# Altium PCB Copy of PCB1.PcbDoc
Units mm, origin at the board's own origin, x right, y up, seen from the top; angles counter-clockwise.
Board outline 152.4 x 101.6 mm, 2 copper layers (Top Layer, Bottom Layer); 14 components, 36 nets, 99 pads, 0 vias.
Unrouted connection lines stored in the file: 9.
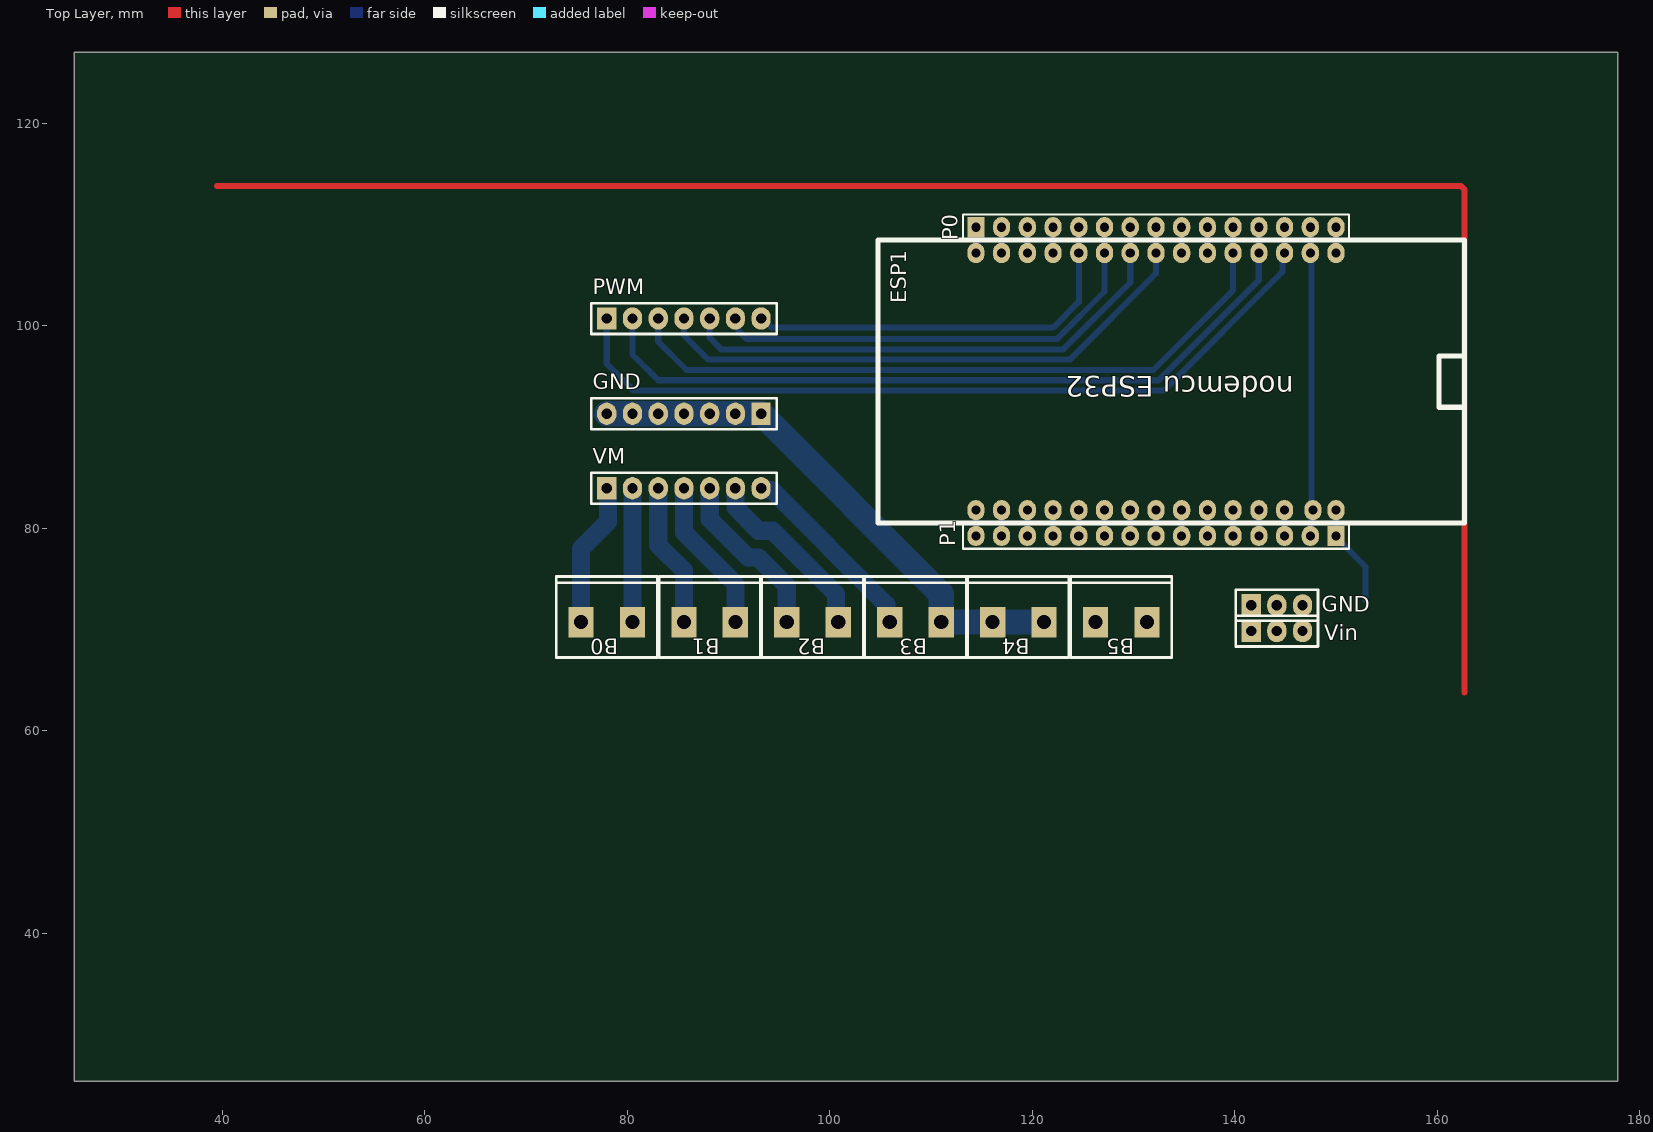
[diagram p0: Top Layer view]
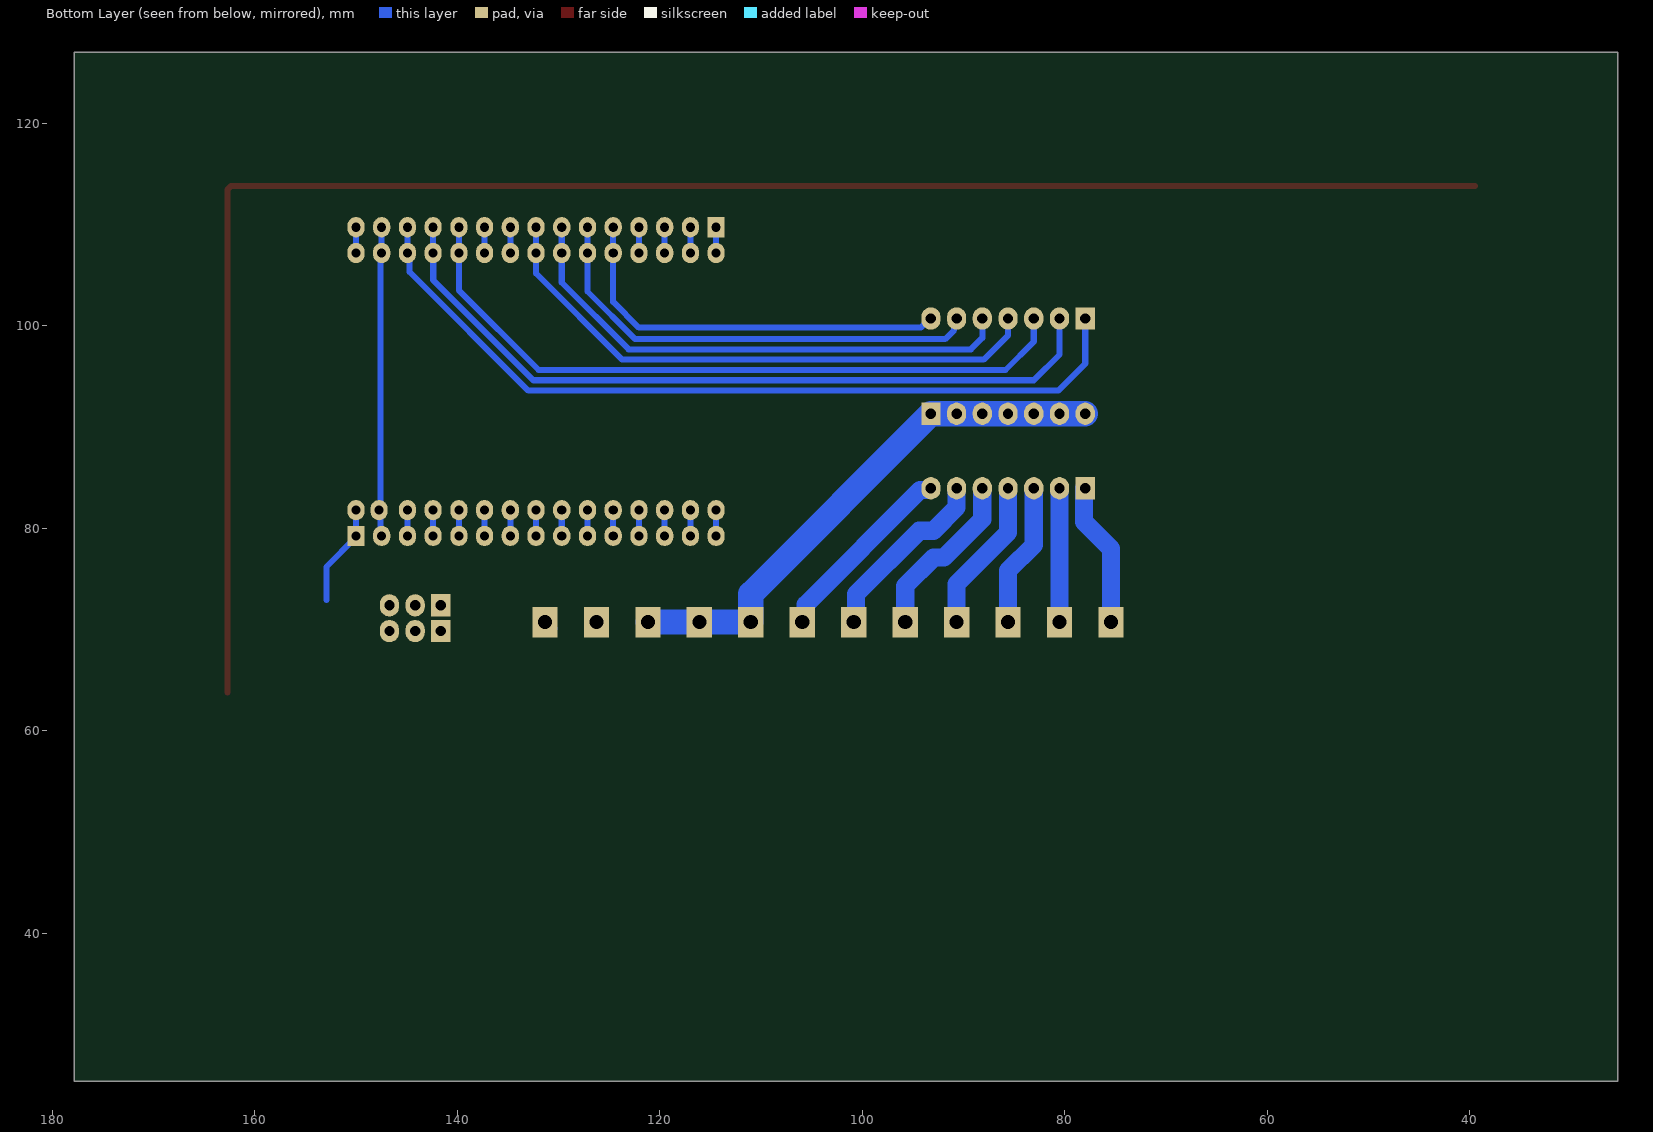
[diagram p1: Bottom Layer view, seen from below]

## Layer stack, top to bottom
Top Solder: solder mask 0.0102, Solder Resist, Dk 3.5
Top Layer: signal copper 0.0356
Dielectric 1: dielectric 0.32, FR-4, Dk 4.8
Bottom Layer: signal copper 0.0356
Bottom Solder: solder mask 0.0102, Solder Resist, Dk 3.5

## Board outline
25.4,25.4 177.8,25.4 177.8,127 25.4,127

## Design rules (kind name [scope] priority, off if disabled: settings)
Clearance [All] p1: gap=0.254 ignorepadtopadclearanceinfootprint=FALSE except(0: Arc-Hole Track-Hole SMDPad-Hole THPad-Hole Via-Hole Fill-Hole Poly-Hole Region-Hole Text-Hole)
ComponentClearance [All] p1: gap=0 collisioncheckmode=3 verticalgap=0 showdistances=FALSE
PolygonConnect [All] p1: connectstyle=Relief reliefconductorwidth=0.254 reliefentries=4 polygonreliefangle="90 Angle" airgapwidth=0.254
RoutingVias [All] p1: holewidth=0.711 width=1.27 viastyle="Through Hole" minholewidth=0.711 minwidth=1.27 maxholewidth=0.711 maxwidth=1.27
SolderMaskExpansion [All] p1: expansion=0.102 istentingtop=FALSE
Width [All] p1: maxlimit=4 minlimit=0.254 preferedwidth=1 toplayer_maxwidth=2 minimp=50.000000 maximp=50.000000 favimp=50.000000
29 further rules are at their usual default settings.

## Classes and differential pairs
component class Esquematico: B0 B1 B2 B3 B4 B5 GND P0 P1 PWM Vin VM

## Components (designator, comment, footprint, x,y, rotation, side; value= is the part's Value field where it differs from the comment)
B0 "bornera" "bornera chica" 82.978,75.239 r180 top
B1 "bornera" "bornera chica" 93.138,75.239 r180 top
B2 "bornera" "bornera chica" 103.298,75.239 r180 top
B3 "bornera" "bornera chica" 113.458,75.239 r180 top
B4 "bornera" "bornera chica" 123.618,75.239 r180 top
B5 "bornera" "bornera chica" 133.778,75.239 r180 top
ESP1 "ESP32" ESP32 149.987,81.788 r90 top
GND "Header 7" "Header 7" 93.218,91.313 r180 top
GND "Header 3" "Header 3" 141.605,72.39 r0 top (schematic designator P2)
P0 "Header 15" HDR1X15 114.427,109.728 r0 top
P1 "Header 15" HDR1X15 149.987,79.248 r180 top
PWM "Header 7" "Header 7" 77.978,100.711 r0 top
Vin "Header 3" "Header 3" 141.605,69.85 r0 top (schematic designator P3)
VM "Header 7" "Header 7" 77.978,83.947 r0 top

## Footprints (in the part's own frame and the unit in brackets; to place one, negate y for a bottom-side part, rotate by r counter-clockwise, add the part's x,y. Pads: shape width x height; smd on the part's side, far side on the other; paste and mask are expansions set on the pad)
"bornera chica" [mm]
  rect 2.5x3 hole 1.4: 1(2.46,4.5) 2(7.54,4.5)
  silkscreen extent 0,0 10,8
ESP32 [mm]
  oval 2x1.7 hole 0.9: 0(0,0) 1(0,2.286) 2(0,5.08) 3(0,7.62) 4(0,10.16) 5(0,12.7) 6(0,15.24) 7(0,17.78) 8(0,20.32) 9(0,22.86) 10(0,25.4) 11(0,27.94) 12(0,30.48) 13(0,33.02) 14(0,35.56) 15(25.4,35.56) 16(25.4,33.02) 17(25.4,30.48) 18(25.4,27.94) 19(25.4,25.4) 20(25.4,22.86) 21(25.4,20.32) 22(25.4,17.78) 23(25.4,15.24) 24(25.4,12.7) 25(25.4,10.16) 26(25.4,7.62) 27(25.4,5.08) 28(25.4,2.54) 29(25.4,0)
  silkscreen extent -1.27,-12.7 26.67,45.21
HDR1X15 [mm] "Connector; Header; 15 Position"
  rect 1.7x2 hole 0.9: 1(0,0)
  oval 1.7x2 hole 0.9: 2(2.54,0) 3(5.08,0) 4(7.62,0) 5(10.16,0) 6(12.7,0) 7(15.24,0) 8(17.78,0) 9(20.32,0) 10(22.86,0) 11(25.4,0) 12(27.94,0) 13(30.48,0) 14(33.02,0) 15(35.56,0)
  silkscreen extent -1.27,-1.27 36.83,1.27
"Header 3" [mm] "Connector; Header; 3 Position; Solder Pad 35mil"
  rect 1.9x2.2 hole 1.016: 1(0,0)
  oval 1.9x2.2 hole 1.016: 2(2.54,0) 3(5.08,0)
  silkscreen extent -1.52,-1.52 6.6,1.52, body extent -1.27,-1.27 6.35,1.27, height 2.11
"Header 7" [mm] "Connector; Header; 7 Position; Solder Pad 35mil"
  rect 1.9x2.2 hole 1.016: 1(0,0)
  oval 1.9x2.2 hole 1.016: 2(2.54,0) 3(5.08,0) 4(7.62,0) 5(10.16,0) 6(12.7,0) 7(15.24,0)
  silkscreen extent -1.52,-1.52 16.76,1.52, body extent -1.27,-1.27 16.51,1.27, height 8.38

## Part data
GND PWM VM: "Header, 7-Pin", LatestRevisionDate=17-Jul-2002, LatestRevisionNote="Re-released for DXP Platform.", Publisher="Altium Limited"
GND Vin: "Header, 3-Pin", LatestRevisionDate=17-Jul-2002, LatestRevisionNote="Re-released for DXP Platform.", Publisher="Altium Limited"
P0 P1: "Header, 15-Pin", LatestRevisionDate=17-Jul-2002, LatestRevisionNote="Re-released for DXP Platform.", Publisher="Altium Limited"

## Nets (pads, with @x,y where several pads share a name; then routed paths per layer and width w, separated by ;. In a path a pad name is that pad's centre, name@x,y a point inside that pad or via, vN(x,y) a via of type N, cw(c..) or ccw(c..) an arc to the next point about the centre after c; other vN are vias at no path point)
ESP_Vin: B5.2 ESP1.0 P1.1 | length 10.1
  Bottom Layer w0.6: ESP1.0 P1.1 149.987,79.098 152.908,76.177 152.908,72.898
GND: B3.1 B4.1 B4.2 B5.1 ESP1.1 ESP1.28 GND.1 GND.2 GND.3 GND.4 GND.5 GND.6 GND.7 P0.14 P1.2 | length 84.9
  Bottom Layer w0.6: P1.2 147.574,79.375 147.574,81.661 ESP1.1 147.574,81.915 147.574,107.061 ESP1.28 P0.14
  Bottom Layer w1.2: B5.1@130.668,70.089 B5.1
  Bottom Layer w2.5: GND.7 GND.6 GND.5 GND.4 88.138,91.313 90.678,91.313 93.218,91.313 110.998,73.533 B3.1 B4.2 B4.1
NetESP1_2: ESP1.2 P1.3 | length 2.5
  Bottom Layer w0.6: P1.3 ESP1.2
NetESP1_3: ESP1.3 P1.4 | length 2.5
  Bottom Layer w0.6: P1.4 ESP1.3
NetESP1_4: ESP1.4 P1.5 | length 2.5
  Bottom Layer w0.6: P1.5 ESP1.4
NetESP1_5: ESP1.5 P1.6 | length 2.5
  Bottom Layer w0.6: P1.6 ESP1.5
NetESP1_6: ESP1.6 P1.7 | length 2.5
  Bottom Layer w0.6: P1.7 ESP1.6
NetESP1_7: ESP1.7 P1.8 | length 2.5
  Bottom Layer w0.6: P1.8 ESP1.7
NetESP1_8: ESP1.8 P1.9 | length 2.5
  Bottom Layer w0.6: P1.9 ESP1.8
NetESP1_9: ESP1.9 P1.10 | length 2.5
  Bottom Layer w0.6: P1.10 ESP1.9
NetESP1_10: ESP1.10 P1.11 | length 2.5
  Bottom Layer w0.6: P1.11 ESP1.10
NetESP1_11: ESP1.11 P1.12 | length 2.5
  Bottom Layer w0.6: P1.12 ESP1.11
NetESP1_12: ESP1.12 P1.13 | length 2.5
  Bottom Layer w0.6: P1.13 ESP1.12
NetESP1_13: ESP1.13 P1.14 | length 2.5
  Bottom Layer w0.6: P1.14 ESP1.13
NetESP1_14: ESP1.14 P1.15 | length 2.5
  Bottom Layer w0.6: P1.15 ESP1.14
NetESP1_15: ESP1.15 P0.1 | length 2.5
  Bottom Layer w0.6: ESP1.15 P0.1
NetESP1_16: ESP1.16 P0.2 | length 2.5
  Bottom Layer w0.6: ESP1.16 P0.2
NetESP1_17: ESP1.17 P0.3 | length 2.5
  Bottom Layer w0.6: ESP1.17 P0.3
NetESP1_18: ESP1.18 P0.4 | length 2.5
  Bottom Layer w0.6: ESP1.18 P0.4
NetESP1_23: ESP1.23 P0.9 | length 2.5
  Bottom Layer w0.6: ESP1.23 P0.9
NetESP1_24: ESP1.24 P0.10 | length 2.5
  Bottom Layer w0.6: ESP1.24 P0.10
NetESP1_29: ESP1.29 P0.15 | length 2.5
  Bottom Layer w0.6: ESP1.29 P0.15
PWM_M0: ESP1.27 P0.13 PWM.1 | length 81.6
  Bottom Layer w0.6: PWM.1 77.978,96.266 80.645,93.599 132.969,93.599 144.703,105.333 144.703,106.984 ESP1.27 P0.13
PWM_M1: ESP1.26 P0.12 PWM.2 | length 75.8
  Bottom Layer w0.6: PWM.2 80.518,97.155 83.058,94.615 132.461,94.615 142.353,104.507 142.353,107.174 ESP1.26 P0.12
PWM_M2: ESP1.25 P0.11 PWM.3 | length 69.7
  Bottom Layer w0.6: PWM.3 83.058,98.425 85.852,95.631 131.953,95.631 139.827,103.505 ESP1.25 P0.11
PWM_M3: ESP1.22 P0.8 PWM.4 | length 57.4
  Bottom Layer w0.6: PWM.4 85.598,99.06 88.011,96.647 123.698,96.647 132.207,105.156 ESP1.22 P0.8
PWM_M4: ESP1.21 P0.7 PWM.5 | length 52.1
  Bottom Layer w0.6: PWM.5 88.138,98.806 89.281,97.663 123.063,97.663 129.667,104.267 ESP1.21 P0.7
PWM_M5: ESP1.20 P0.6 PWM.6 | length 46.1
  Bottom Layer w0.6: PWM.6 90.927,100.462 90.927,99.573 91.821,98.679 122.428,98.679 127.127,103.378 ESP1.20 P0.6
PWM_M6: ESP1.19 P0.5 PWM.7 | length 40.2
  Bottom Layer w0.6: PWM.7 93.33,100.711 94.219,99.822 122.047,99.822 124.587,102.362 ESP1.19 P0.5
VM0: B0.2 VM.1 | length 14.3
  Bottom Layer w1.8: B0.2 75.438,77.978 78.105,80.645 VM.1@78.105,83.947
VM1: B0.1 VM.2 | length 13.2
  Bottom Layer w1.8: B0.1 VM.2
VM2: B1.2 VM.3 | length 14.3
  Bottom Layer w1.8: VM.3 83.058,78.359 85.598,75.819 B1.2
VM3: B1.1 VM.4 | length 15.3
  Bottom Layer w1.8: VM.4 85.598,79.573 90.678,74.493 B1.1
VM4: B2.2 VM.5 | length 17
  Bottom Layer w1.8: VM.5 88.138,80.899 91.921,77.116 92.937,77.116 95.758,74.295 B2.2
VM5: B2.1 VM.6 | length 18.2
  Bottom Layer w1.8: VM.6 90.678,82.042 92.964,79.756 94.361,79.756 100.624,73.493 100.624,71.339 100.838,71.125 B2.1
VM6: B3.2 Vin.1 Vin.2 Vin.3 VM.7 | length 18.9
  Bottom Layer w1.8: VM.7@93.264,83.778 94.276,83.778 105.568,72.486 105.568,71.089 B3.2
copper on no net: | length 173
  Top Layer w0.6: 39.497,113.792 162.336,113.792 162.687,113.441 162.687,63.792

## Text inside footprints (layer, text, board x,y; h text height)
ESP1: Top Overlay "nodemcu ESP32" at 145.796,94.996 h2.03 r180